# Altium PCB IRsensor_Relayx4_Controller.PcbDoc
Units mm, origin at the board's own origin, x right, y up, seen from the top; angles counter-clockwise.
Board outline 99.44 x 78.23 mm, 2 copper layers (Top Layer, Bottom Layer); 34 components, 26 nets, 92 pads, 0 vias.
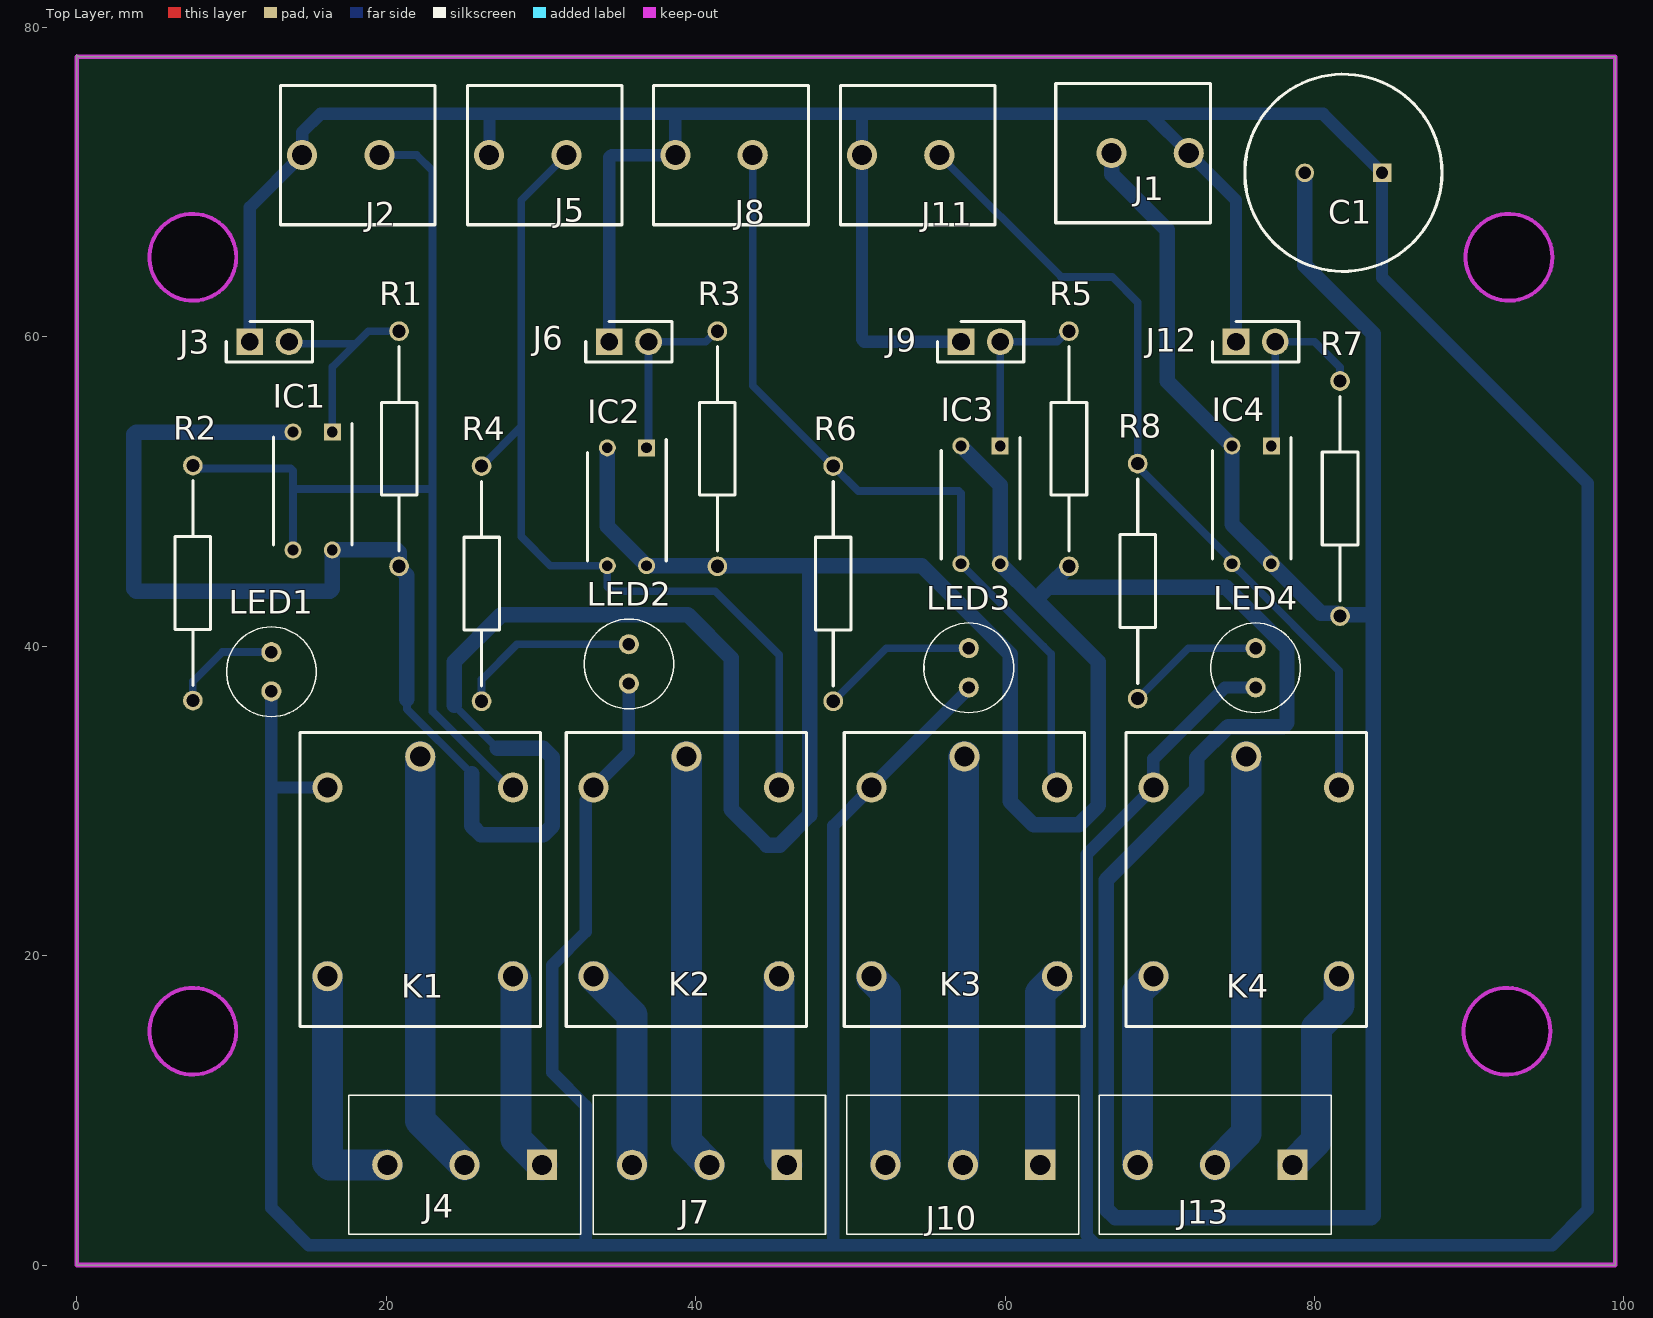
[diagram p0: Top Layer view]
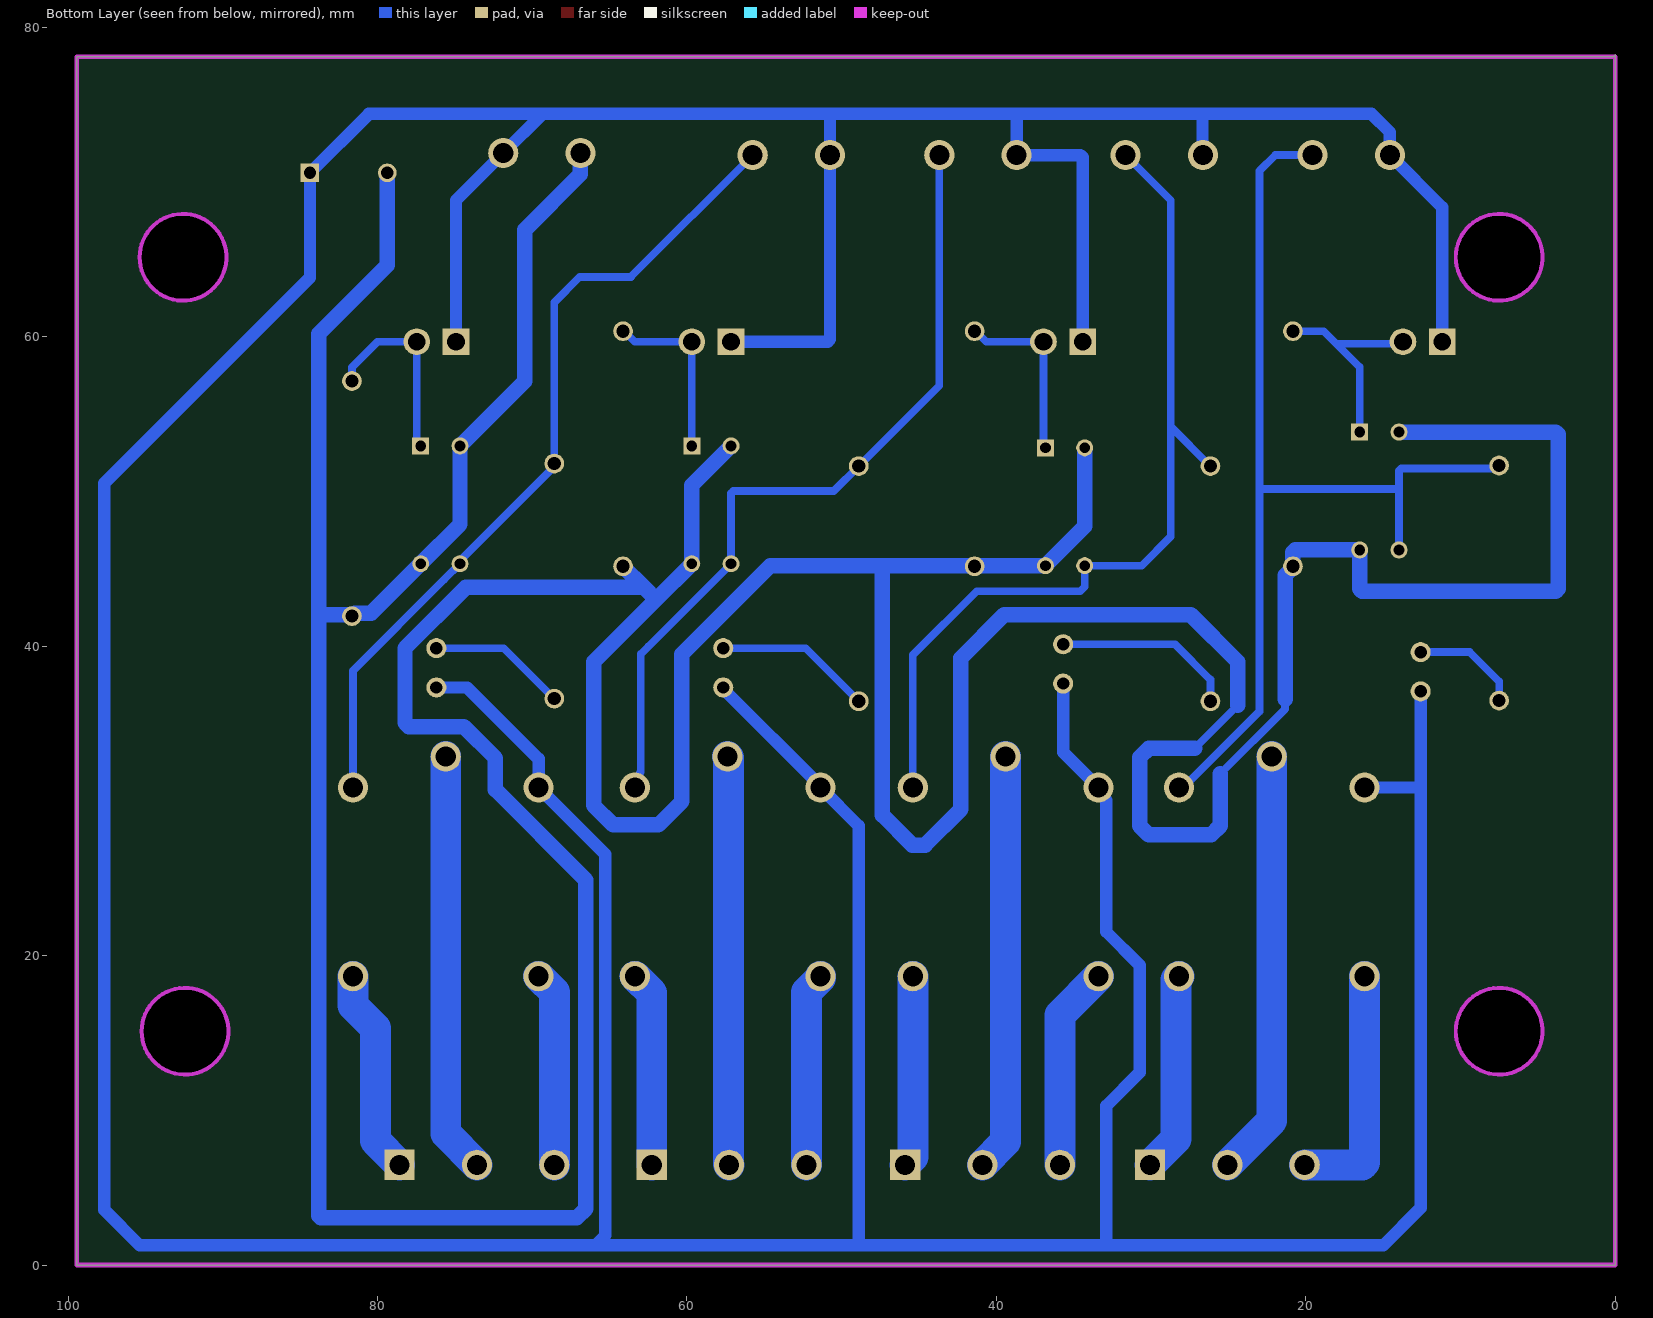
[diagram p1: Bottom Layer view, seen from below]
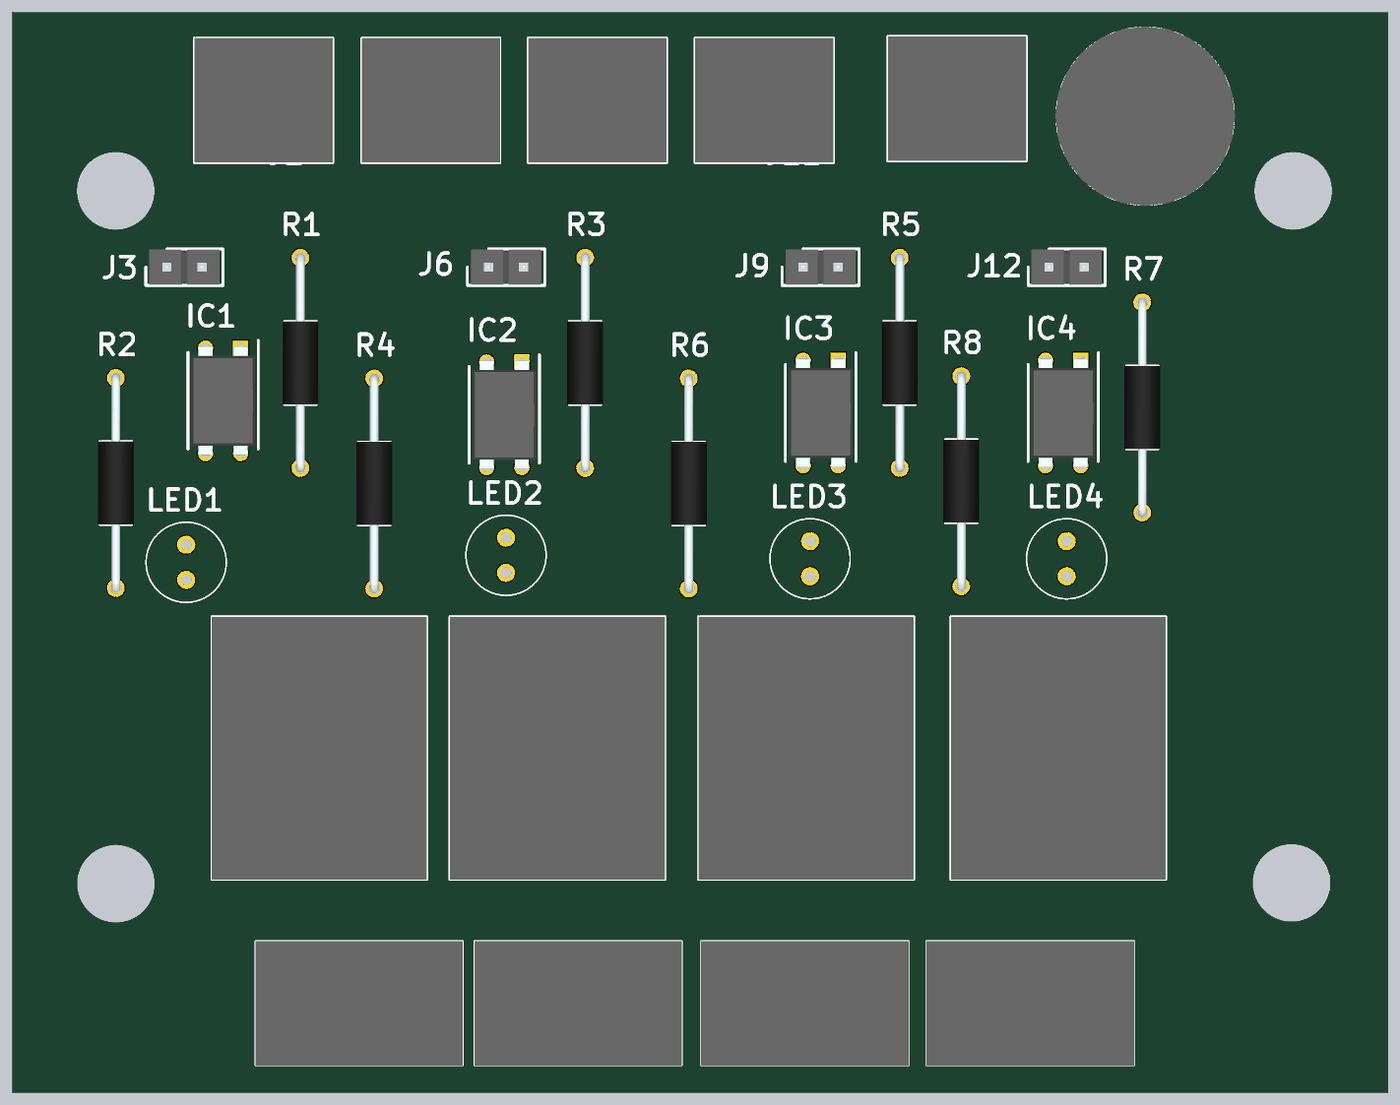
[diagram p2: 3D render of the assembled board from above, using the file's embedded part models]

## Layer stack, top to bottom
Top Solder: solder mask 0.0102, Solder Resist, Dk 3.5
Top Layer: signal copper 0.0356
Dielectric 1: dielectric 0.32, FR-4, Dk 4.8
Bottom Layer: signal copper 0.0356
Bottom Solder: solder mask 0.0102, Solder Resist, Dk 3.5

## Board outline
0,0 99.441,0 99.441,78.105 0.127,78.105 0,78.232
cut-out: 7.482,62.405 cw(c7.482,65.21) 4.676,65.21 cw(c7.482,65.21) 7.482,68.016 cw(c7.482,65.21) 10.287,65.21 cw(c7.482,65.21)
cut-out: 92.572,62.405 cw(c92.572,65.21) 89.766,65.21 cw(c92.572,65.21) 92.572,68.016 cw(c92.572,65.21) 95.377,65.21 cw(c92.572,65.21)
cut-out: 92.445,12.367 cw(c92.445,15.172) 89.639,15.172 cw(c92.445,15.172) 92.445,17.978 cw(c92.445,15.172) 95.25,15.172 cw(c92.445,15.172)
cut-out: 7.493,12.307 cw(c7.493,15.113) 4.687,15.113 cw(c7.493,15.113) 7.493,17.919 cw(c7.493,15.113) 10.299,15.113 cw(c7.493,15.113)

## Design rules (kind name [scope] priority, off if disabled: settings)
Clearance [All] p1: gap=0.254 ignorepadtopadclearanceinfootprint=FALSE except(0: Arc-Hole Track-Hole SMDPad-Hole THPad-Hole Via-Hole Fill-Hole Poly-Hole Region-Hole Text-Hole)
PolygonConnect [All] p1: connectstyle=Relief reliefconductorwidth=0.254 reliefentries=4 polygonreliefangle="90 Angle" airgapwidth=0.254
RoutingVias [All] p1: holewidth=0.711 width=1.27 viastyle="Through Hole" minholewidth=0.711 minwidth=1.27 maxholewidth=0.711 maxwidth=1.27
SolderMaskExpansion [All] p1: expansion=0.102 istentingtop=FALSE
Width [All] p1: maxlimit=2 minlimit=0.254 preferedwidth=0.254
30 further rules are at their usual default settings.

## Components (designator, comment, footprint, x,y, rotation, side; value= is the part's Value field where it differs from the comment)
C1 "UVR1H102MHD1TO" CAPPRD500W60D1275H2700 84.375,70.612 r180 top
IC1 "SFH617A-2X" DIP762W50P254L458H400Q4N 15.24,50.038 r270 top
IC2 "SFH617A-2X" DIP762W50P254L458H400Q4N 35.56,49.022 r270 top
IC3 "SFH617A-2X" DIP762W50P254L458H400Q4N 58.42,49.149 r270 top
IC4 "SFH617A-2X" DIP762W50P254L458H400Q4N 75.946,49.149 r270 top
J1 "1935776" 1935776 66.882,71.882 r0 top
J2 "1935776" 1935776 19.558,71.755 r180 top
J3 "M20-9990246" HDRV2W66P0X254_1X2_508X254X874P 11.176,59.69 r0 top
J4 "1935789" 1935789 30.066,6.477 r180 top
J5 "1935776" 1935776 31.647,71.755 r180 top
J6 "M20-9990246" HDRV2W66P0X254_1X2_508X254X874P 34.417,59.69 r0 top
J7 "1935789" 1935789 45.894,6.477 r180 top
J8 "1935776" 1935776 43.688,71.755 r180 top
J9 "M20-9990246" HDRV2W66P0X254_1X2_508X254X874P 57.15,59.69 r0 top
J10 "1935789" 1935789 62.277,6.477 r180 top
J11 "1935776" 1935776 55.753,71.755 r180 top
J12 "M20-9990246" HDRV2W66P0X254_1X2_508X254X874P 74.93,59.69 r0 top
J13 "1935789" 1935789 78.58,6.477 r180 top
K1 "J107F1CS1224VDC.36" J107F1CS1224VDC36 16.194,30.869 r270 top
K2 "J107F1CS1224VDC.36" J107F1CS1224VDC36 33.401,30.869 r270 top
K3 "J107F1CS1224VDC.36" J107F1CS1224VDC36 51.373,30.869 r270 top
K4 "J107F1CS1224VDC.36" J107F1CS1224VDC36 69.596,30.869 r270 top
LED1 "C503B-RCN-CW0Z0AA1" C503BRCNCW0Z0AA1 12.573,37.084 r90 top
LED2 "C503B-RCN-CW0Z0AA1" C503BRCNCW0Z0AA1 35.687,37.592 r90 top
LED3 "C503B-RCN-CW0Z0AA1" C503BRCNCW0Z0AA1 57.658,37.338 r90 top
LED4 "C503B-RCN-CW0Z0AA1" C503BRCNCW0Z0AA1 76.2,37.338 r90 top
R1 "CF14JT10K0" RESAD1520W63L600D230 20.828,60.371 r270 top
R2 "CF14JT10K0" RESAD1520W63L600D230 7.493,36.489 r90 top
R3 "CF14JT10K0" RESAD1520W63L600D230 41.402,60.371 r270 top
R4 "CF14JT10K0" RESAD1520W63L600D230 26.162,36.449 r90 top
R5 "CF14JT10K0" RESAD1520W63L600D230 64.135,60.371 r270 top
R6 "CF14JT10K0" RESAD1520W63L600D230 48.895,36.449 r90 top
R7 "CF14JT10K0" RESAD1520W63L600D230 81.661,57.15 r270 top
R8 "CF14JT10K0" RESAD1520W63L600D230 68.58,36.616 r90 top

## Footprints (in the part's own frame and the unit in brackets; to place one, negate y for a bottom-side part, rotate by r counter-clockwise, add the part's x,y. Pads: shape width x height; smd on the part's side, far side on the other; paste and mask are expansions set on the pad)
1935776 [mm]
  round 1.95 hole 1.3: 1(0,0) 2(5,0)
  silkscreen extent -3.6,-4.5 6.4,4.5, body extent -3.6,-4.5 6.4,4.5, height 13.6
1935789 [mm]
  rect 1.95x1.95 hole 1.3: 1(0,0)
  round 1.95 hole 1.3: 2(5,0) 3(10,0)
  silkscreen extent -2.5,-4.5 12.5,4.5, body extent -2.5,-4.5 12.5,4.5, height 13.75
C503BRCNCW0Z0AA1 [mm]
  round 1.3 hole 0.8: 1(0,0) 2(2.54,0)
  silkscreen extent -1.63,-2.9 4.17,2.9
CAPPRD500W60D1275H2700 [mm]
  rect 1.2x1.2 hole 0.8: 1(0,0)
  round 1.2 hole 0.8: 2(5,0)
  silkscreen extent -3.88,-6.37 8.87,6.37, body extent -4,-6.5 9,6.5, height 27
DIP762W50P254L458H400Q4N [mm]
  rect 1.1x1.1 hole 0.7: 1(-3.81,1.27)
  round 1.1 hole 0.7: 2(-3.81,-1.27) 3(3.81,-1.27) 4(3.81,1.27)
  silkscreen extent -4.36,-2.54 3.5,2.54, body extent -3.94,-2.29 3.94,2.29, height 4
HDRV2W66P0X254_1X2_508X254X874P [mm]
  rect 1.725x1.725 hole 1.15: 1(0,0)
  round 1.725 hole 1.15: 2(2.54,0)
  silkscreen extent -1.52,-1.32 4.06,1.32, body extent -1.27,-1.27 3.81,1.27, height 8.74
J107F1CS1224VDC36 [mm]
  round 1.95 hole 1.3: 1(0,0) 2(0,12) 3(-2,6) 4(12.2,12) 5(12.2,0)
  silkscreen extent -3.55,-1.77 15.45,13.76, body extent -3.55,-1.77 15.45,13.76, height 15.39
RESAD1520W63L600D230 [mm]
  round 1.275 hole 0.85: 1(0,0) 2(15.2,0)
  silkscreen extent 0.99,-1.15 14.21,1.15, body extent -0.31,-1.3 15.52,1.3, height 2.59

## Part data
C1: "Capacitor Polarised", Manufacturer_Name=Nichicon, Mouser Part Number=647-UVR1H102MHD1T0, Arrow Part Number=UVR1H102MHD1TO, Arrow Price/Stock=https://www.arrow.com/en/products/uvr1h102mhd1to/nichicon, Datasheet Link=http://nichicon-us.com/english/products/pdfs/e-uvr.pdf, Height=27mm, Manufacturer_Part_Number=UVR1H102MHD1TO, Mouser Price/Stock=https://www.mouser.co.uk/ProductDetail/Nichicon/UVR1H102MHD1TO?qs=Wu4QelNNmeNg4t%252BBksLOmQ%3D%3D
IC1 IC2 IC3 IC4: "Integrated Circuit", Manufacturer_Name=Isocom, Datasheet Link=http://www.farnell.com/datasheets/91023.pdf?_ga=2.50651689.1688980470.1514904698-1411154270.1472651675, Height=4mm, Manufacturer_Part_Number=SFH617A-2X
J1 J2 J5 J8 J11: "Connector", Manufacturer_Name="Phoenix Contact", Mouser Part Number=651-1935776, Arrow Part Number=1935776, Arrow Price/Stock=https://www.arrow.com/en/products/1935776/phoenix-contact?region=nac, Datasheet Link=https://datasheet.datasheetarchive.com/originals/distributors/Datasheets-DGA18/1075322.pdf, Height=13.5mm, Manufacturer_Part_Number=1935776, Mouser Price/Stock=https://www.mouser.co.uk/ProductDetail/Phoenix-Contact/1935776?qs=gjk32EaArKJ3oesOAo3TWA%3D%3D
J3 J6 J9 J12: "Connector", Manufacturer_Name=Harwin, Mouser Part Number=855-M20-9990246, Datasheet Link=https://cdn.harwin.com/pdfs/M20-999.pdf, Height=8.74mm, Manufacturer_Part_Number=M20-9990246, Mouser Price/Stock=https://www.mouser.co.uk/ProductDetail/Harwin/M20-9990246?qs=Jph8NoUxIfWjw4WmyRvzag%3D%3D
J4 J7 J10 J13: "Connector", Manufacturer_Name="Phoenix Contact", Mouser Part Number=651-1935789, Arrow Part Number=1935789, Arrow Price/Stock=https://www.arrow.com/en/products/1935789/phoenix-contact?region=nac, Datasheet Link=https://www.phoenixcontact.com/online/portal/us?uri=pxc-oc-itemdetail:pid=1935789&library=usen&tab=1, Height=13.65mm, Manufacturer_Part_Number=1935789, Mouser Price/Stock=https://www.mouser.co.uk/ProductDetail/Phoenix-Contact/1935789?qs=Acf35Ay%2FzLfkp38c%252B1VczQ%3D%3D
K1 K2 K3 K4: "Relay or Contactor", Manufacturer_Name=CIT, Datasheet Link=https://www.citrelay.com/Catalog%20Pages/RelayCatalog/J107F.pdf, Height=15.29mm, Manufacturer_Part_Number=J107F1CS1224VDC.36
LED1 LED2 LED3 LED4: "LED", Manufacturer_Name=Cree, Mouser Part Number=941-C503BRCNCW0Z0AA1, Arrow Part Number=C503B-RCN-CW0Z0AA1, Arrow Price/Stock=https://www.arrow.com/en/products/c503b-rcn-cw0z0aa1/cree, Datasheet Link=https://www.cree.com/led-components/media/documents/C503B-RAS-RAN-AAS-AAN-RBS-RBN-ABS-ABN-RCS-RCN-ACS-ACN-1079.pdf, Manufacturer_Part_Number=C503B-RCN-CW0Z0AA1, Mouser Price/Stock=https://www.mouser.com/Search/Refine.aspx?Keyword=941-C503BRCNCW0Z0AA1
R1 R2 R3 R4 R5 R6 R7 R8: "Resistor", Manufacturer_Name="Stackpole Electronics Inc.", Arrow Part Number=CF14JT10K0, Arrow Price/Stock=https://www.arrow.com/en/products/cf14jt10k0/stackpole-electronics?region=nac, Datasheet Link=https://www.seielect.com/catalog/sei-cf_cfm.pdf, Manufacturer_Part_Number=CF14JT10K0

## Nets (pads, with @x,y where several pads share a name; then routed paths per layer and width w, separated by ;. In a path a pad name is that pad's centre, name@x,y a point inside that pad or via, vN(x,y) a via of type N, cw(c..) or ccw(c..) an arc to the next point about the centre after c; other vN are vias at no path point)
GND: C1.2 IC1.2 IC1.4 IC2.2 IC2.4 IC3.2 IC3.4 IC4.2 IC4.4 J1.1 R1.2 R3.2 R5.2 R7.2 | length 400.4
  Bottom Layer w0.5: 21.336,36.576 21.336,35.941 25.527,31.75 ; 24.384,36.195 27.178,33.401
  Bottom Layer w1: IC1.2 3.832,53.848 3.683,53.699 3.683,43.71 3.832,43.561 16.361,43.561 16.51,43.71 IC1.4 20.679,46.228 20.828,46.079 20.828,45.096 21.336,44.588 21.336,36.576 ; 24.384,36.195 24.384,38.989 27.432,42.037 39.497,42.037 42.291,39.243 42.291,29.464 44.607,27.148 45.436,27.148 47.371,29.083 47.371,45.212 ; 25.527,31.75 25.527,28.399 26.113,27.813 30.148,27.813 30.734,28.399 30.734,32.815 30.148,33.401 27.178,33.401 ; IC2.2 34.29,47.752 IC2.4 41.402,45.212 46.757,45.212 46.99,45.212 54.61,45.212 60.325,39.497 60.325,29.972 61.849,28.448 64.77,28.448 66.04,29.718 66.04,38.989 61.997,43.032 ; IC3.2 59.69,50.419 IC3.4 61.997,43.032 ; R5.2 62.779,43.815 ; J1.1 66.888,71.876 66.888,70.526 70.485,66.929 70.485,57.15 IC4.2 74.676,47.879 IC4.4 80.414,42.141 81.47,42.141 R7.2 81.751,42.04 83.82,42.04 ; C1.2 79.375,64.643 83.82,60.198 83.82,42.04 ; 61.997,43.032 62.779,43.815 ; 62.779,43.815 74.295,43.815 78.232,39.878 78.232,35.052 77.978,34.798 74.422,34.798 72.39,32.766 72.39,30.734 66.548,24.892 66.548,3.634 67.134,3.048 83.671,3.048 83.82,3.197 83.82,42.04
NetIC1_1: IC1.1 J3.2 R1.1 | length 14.2
  Bottom Layer w0.5: J3.2@14.113,59.69 13.843,59.69 J3.2 13.843,59.563 14.113,59.563 18.021,59.563 ; IC1.1 16.51,58.052 18.021,59.563 ; R1.1 18.828,60.371 18.021,59.563
NetIC1_3: IC1.3 J2.1 K1.2 R2.2 | length 66.8
  Bottom Layer w0.5: R2.2 7.688,51.494 13.821,51.494 13.97,51.345 13.97,50.165 ; IC1.3 13.97,50.165 ; J2.1 21.971,71.755 22.995,70.731 22.995,50.165 ; K1.2 27.908,30.869 22.995,35.782 22.995,50.165 ; 13.97,50.165 22.995,50.165
NetIC2_1: IC2.1 J6.2 R3.1 | length 11.6
  Bottom Layer w0.5: IC2.1 36.957,52.959 J6.2 40.643,59.69 41.323,60.371 R3.1
NetIC2_3: IC2.3 J5.1 K2.2 R4.2 | length 58.7
  Bottom Layer w0.5: R4.2 28.722,54.209 ; J5.1 28.722,68.83 28.722,54.209 ; K2.2 45.401,39.435 41.275,43.561 34.583,43.561 34.29,43.854 IC2.3 30.607,45.212 28.722,47.097 28.722,54.209
NetIC3_1: IC3.1 J9.2 R5.1 | length 11.5
  Bottom Layer w0.5: IC3.1 J9.2 63.376,59.69 64.056,60.371 R5.1
NetIC3_3: IC3.3 J8.1 K3.2 R6.2 | length 52.8
  Bottom Layer w0.5: J8.1 43.688,56.856 R6.2 50.506,50.038 57.001,50.038 57.15,49.889 IC3.3 62.484,40.005 62.992,39.497 62.992,31.866 63.048,31.809 63.048,31.194 K3.2
NetIC4_1: IC4.1 J12.2 R7.1 | length 12.6
  Bottom Layer w0.5: IC4.1 77.47,53.213 J12.2 80.01,59.69 81.661,58.039 R7.1
NetIC4_3: IC4.3 J11.1 K4.2 R8.2 | length 53.5
  Bottom Layer w0.5: J11.1 63.627,63.881 66.929,63.881 68.58,62.23 R8.2 68.58,51.625 74.676,45.529 IC4.3 75.692,44.323 81.596,38.419 K4.2
NetJ4_1: J4.1 K1.4 | length 13
  Bottom Layer w2: K1.4 28.393,18.47 28.393,8.15 J4.1
NetJ4_2: J4.2 K1.3 | length 27.6
  Bottom Layer w2: K1.3 22.194,9.349 J4.2
NetJ4_3: J4.3 K1.5 | length 16
  Bottom Layer w2: K1.5 16.194,6.626 16.343,6.477 J4.3
NetJ7_1: J7.1 K2.4 | length 12.4
  Bottom Layer w2: K2.4 45.401,6.97 J7.1
NetJ7_2: J7.2 K2.3 | length 27
  Bottom Layer w2: K2.3 39.401,7.97 J7.2
NetJ7_3: J7.3 K2.5 | length 13.2
  Bottom Layer w2: K2.5 35.894,16.176 J7.3
NetJ10_1: J10.1 K3.4 | length 12.6
  Bottom Layer w2: J10.1 62.277,17.573 K3.4
NetJ10_2: J10.2 K3.3 | length 26.4
  Bottom Layer w2: J10.2 57.325,6.525 57.325,32.821 K3.3
NetJ10_3: J10.3 K3.5 | length 12.6
  Bottom Layer w2: K3.5 51.373,18.559 52.277,17.655 J10.3
NetJ13_1: J13.1 K4.4 | length 13.4
  Bottom Layer w2: J13.1 80.137,8.034 80.137,15.326 81.596,16.785 K4.4
NetJ13_2: J13.2 K4.3 | length 27.2
  Bottom Layer w2: J13.2 75.596,8.493 K4.3
NetJ13_3: J13.3 K4.5 | length 12.6
  Bottom Layer w2: J13.3 68.58,17.653 K4.5
NetLED1_2: LED1.2 R2.1 | length 7.1
  Bottom Layer w0.5: R2.1 7.493,37.719 9.398,39.624 LED1.2
NetLED2_2: LED2.2 R4.1 | length 11.9
  Bottom Layer w0.5: R4.1 26.162,37.846 28.448,40.132 LED2.2
NetLED3_2: LED3.2 R6.1 | length 10.2
  Bottom Layer w0.5: R6.1 52.324,39.878 LED3.2
NetLED4_2: LED4.2 R8.1 | length 9
  Bottom Layer w0.5: R8.1 71.842,39.878 LED4.2
VCC: C1.1 J1.2 J2.2 J3.1 J5.2 J6.1 J8.2 J9.1 J11.2 J12.1 K1.1 K2.1 K3.1 K4.1 LED1.1 LED2.1 LED3.1 LED4.1 | length 464.2
  Bottom Layer w0.8: J3.1 11.176,68.373 J2.2 14.558,73.232 15.748,74.422 26.67,74.422 ; LED1.1 12.573,30.869 ; K1.1 12.573,30.869 ; J5.2 26.67,71.778 26.67,74.422 ; J6.1 34.417,71.606 34.566,71.755 J8.2 38.688,74.422 ; LED2.1 35.687,33.155 K2.1 33.401,30.558 32.893,30.05 32.893,21.543 30.734,19.384 30.734,12.445 32.893,10.286 32.893,1.27 ; J9.1 50.902,59.69 50.753,59.839 J11.2 50.753,74.422 ; LED3.1 57.658,37.246 51.373,30.961 K3.1 48.895,28.391 48.895,1.419 49.044,1.27 ; J12.1 74.93,68.834 J1.2 69.342,74.422 ; LED4.1 74.212,37.338 69.596,32.722 K4.1 65.278,26.551 65.278,1.927 65.935,1.27 ; 12.573,30.869 12.573,3.683 14.986,1.27 32.893,1.27 ; 26.67,74.422 38.688,74.422 ; 32.893,1.27 49.044,1.27 ; 38.688,74.422 50.753,74.422 ; 49.044,1.27 65.935,1.27 ; 50.753,74.422 69.342,74.422 ; 65.935,1.27 95.377,1.27 97.663,3.556 97.663,50.546 84.375,63.834 C1.1 80.565,74.422 69.342,74.422

## Keep-outs
Keep-Out Layer:
  circle w0.254: c7.493,65.151 r2.806
  circle w0.254: c92.583,65.151 r2.806
  circle w0.254: c92.456,15.113 r2.806
  circle w0.254: c7.493,15.113 r2.806
  lines w0.3: 0,0 0,78.105 99.441,78.105 99.441,0 0,0